# EAGLE board sensor LF (EAGLE 7.1.0)
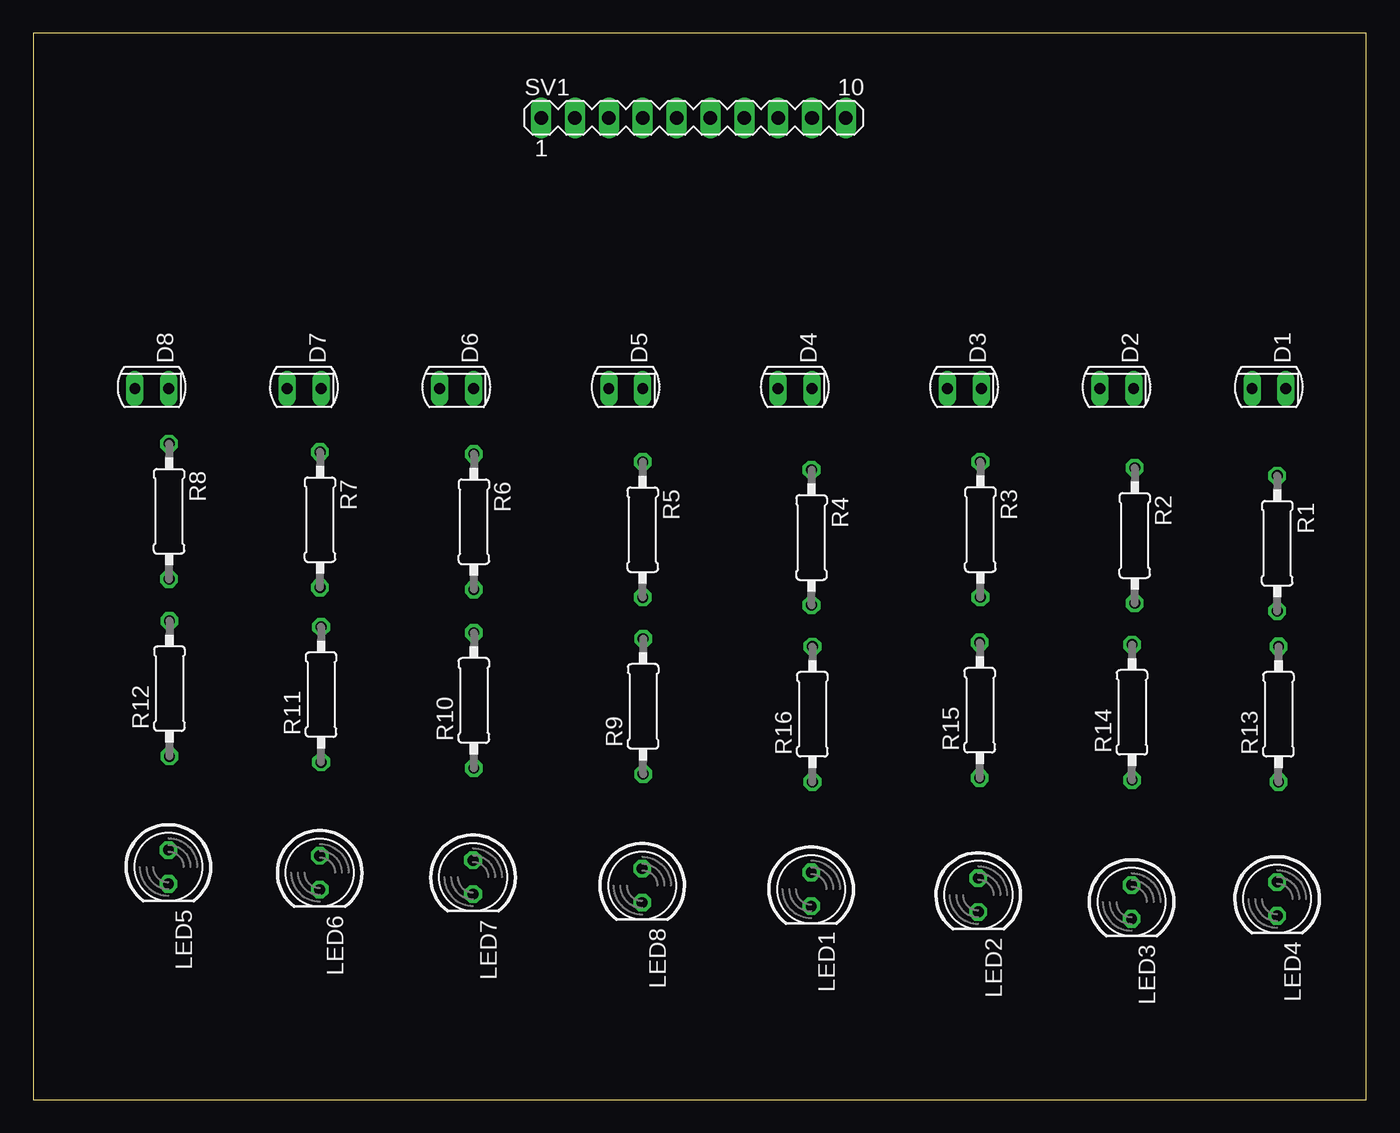
[diagram p0: board, top side]
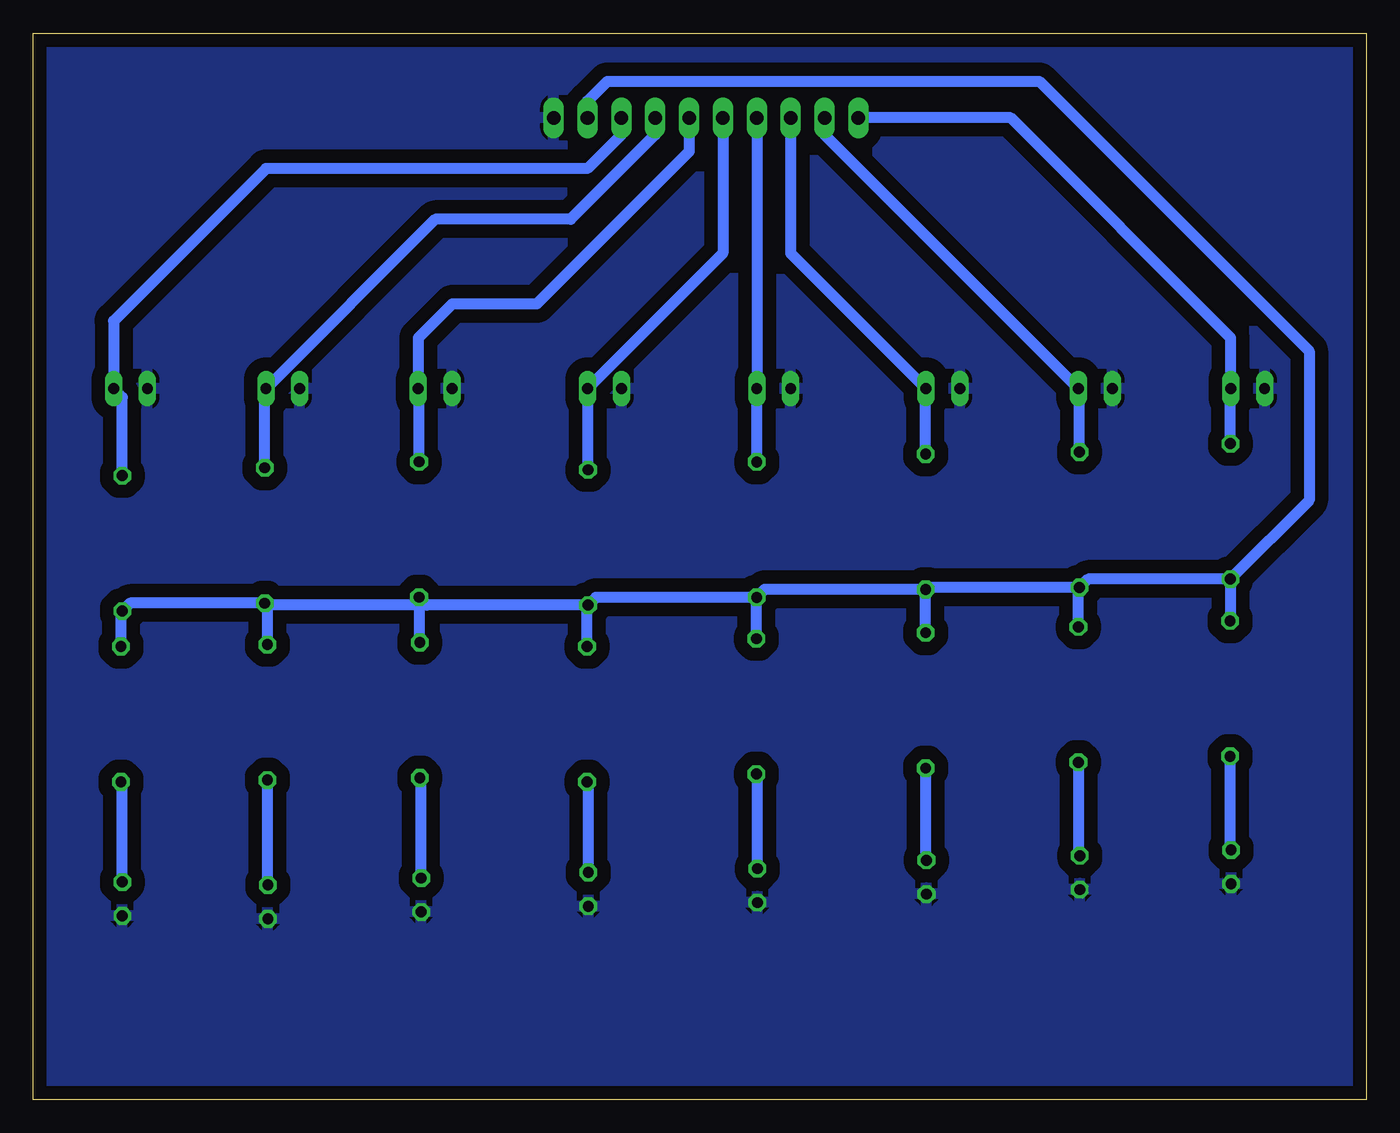
[diagram p1: board, bottom side, seen from below]

Size 100 x 80 mm. Coordinates in mm from the lower left corner, seen from the top.
Outline: 0,0 100,0 100,80 0,80 0,0
Copper layers (1*16): Top 0.035mm / dielectric 1.5mm / Bottom 0.035mm
Design rules "default": minimum track width 10mil, minimum drill 24mil, track to track 8mil, track to pad 8mil, pad to pad 8mil, via to via 8mil, smd to smd 8mil, copper to edge 40mil, drill to drill 8mil, minimum pad ring 10mil, minimum via ring 8mil, stop-mask expansion 4mil, vias tented up to drill 0mil, thermal gap 10mil

## Footprints (pad centres in the part's own frame; a part is rotated, then mirrored left to right if it is on the bottom)
SFH225 = drill 0.813 long: A 0,1.27; K 0,-1.27
LED5MM = drill 0.813 octagon: A -1.27,0; K 1.27,0
0207/10 = drill 0.813 octagon: 1 -5.08,0; 2 5.08,0
MA10-1 = drill 1.016 long: 1 -11.43,0; 2 -8.89,0; 3 -6.35,0; 4 -3.81,0; 5 -1.27,0; 6 1.27,0; 7 3.81,0; 8 6.35,0; 9 8.89,0; 10 11.43,0

## Placement (x,y rotation side)
D1  PhotoDioda  [SFH225]  92.71,53.34 90 top
D2  PhotoDioda  [SFH225]  81.28,53.34 90 top
D3  PhotoDioda  [SFH225]  69.85,53.34 90 top
D4  PhotoDioda  [SFH225]  57.15,53.34 90 top
D5  PhotoDioda  [SFH225]  44.45,53.34 90 top
D6  PhotoDioda  [SFH225]  31.75,53.34 90 top
D7  PhotoDioda  [SFH225]  20.32,53.34 90 top
D8  PhotoDioda  [SFH225]  8.89,53.34 90 top
LED1  LED putih SB  [LED5MM]  58.36,15.78 270 top
LED2  LED putih SB  [LED5MM]  70.9,15.35 270 top
LED3  LED putih SB  [LED5MM]  82.4,14.83 270 top
LED4  LED putih SB  [LED5MM]  93.32,15.05 270 top
LED5  LED putih SB  [LED5MM]  10.13,17.45 270 top
LED6  LED putih SB  [LED5MM]  21.49,17.02 270 top
LED7  LED putih SB  [LED5MM]  32.99,16.69 270 top
LED8  LED putih SB  [LED5MM]  45.68,16.05 270 top
R1  [0207/10]  93.32,41.73 270 top
R2  [0207/10]  82.63,42.32 270 top
R3  [0207/10]  71.05,42.77 270 top
R4  [0207/10]  58.38,42.17 270 top
R5  [0207/10]  45.72,42.76 270 top
R6  [0207/10]  33.05,43.35 270 top
R7  [0207/10]  21.51,43.5 270 top
R8  [0207/10]  10.18,44.13 270 top
R9  330  [0207/10]  45.75,29.5 90 top
R10  330  [0207/10]  33.05,29.94 90 top
R11  330  [0207/10]  21.59,30.38 90 top
R12  330  [0207/10]  10.22,30.83 90 top
R13  330  [0207/10]  93.42,28.91 90 top
R14  330  [0207/10]  82.44,29.05 90 top
R15  330  [0207/10]  71.01,29.21 90 top
R16  330  [0207/10]  58.45,28.91 90 top
SV1  [MA10-1]  49.53,73.66 0 top

## Library data of the parts
D1-D8 = opto-trans-siemens
LED1-LED8 = led
R1-R16 = resistor
SV1 = con-lstb

## Nets
GND: D1.A D2.A D3.A D4.A D5.A D6.A D7.A D8.A LED1.K LED2.K LED3.K LED4.K LED5.K LED6.K LED7.K LED8.K SV1.10
N$1: LED7.A R10.1
N$2: D7.K R7.1 SV1.2
N$3: D8.K R8.1 SV1.1
N$4: D1.K R1.1 SV1.8
N$5: D2.K R2.1 SV1.7
N$6: D3.K R3.1 SV1.6
N$7: D5.K R5.1 SV1.4
N$8: D4.K R4.1 SV1.5
N$9: D6.K R6.1 SV1.3
N$10: LED6.A R11.1
N$11: LED5.A R12.1
N$12: LED4.A R13.1
N$13: LED3.A R14.1
N$14: LED2.A R15.1
N$15: LED1.A R16.1
N$16: LED8.A R9.1
VCC: R1.2 R2.2 R3.2 R4.2 R5.2 R6.2 R7.2 R8.2 R9.2 R10.2 R11.2 R12.2 R13.2 R14.2 R15.2 R16.2 SV1.9

## Tracks (layer width: path | path; a pad name or v marks a point on that pad's centre or on a via)
GND
  pour Bottom (isolate 1.016): 0.44,79.65 0.59,79.65 0.59,0.15 99.55,0.15 99.55,79.8 0.59,79.8
N$1
  Bottom 0.813: R10.1 33.05,18.02 LED7.A
N$2
  Bottom 0.813: SV1.2 40.64,72.39 D7.K 21.51,53.26 R7.1
N$3
  Bottom 0.813: SV1.1 26.67,73.66 10.16,57.15 D8.K 10.18,53.32 R8.1
N$4
  Bottom 0.813: SV1.8 55.88,72.39 58.42,69.85 82.55,69.85 93.98,58.42 D1.K 93.33,52.69 R1.1
N$5
  Bottom 0.813: SV1.7 53.34,72.39 59.69,66.04 69.85,66.04 D2.K 82.63,53.26 R2.1
N$6
  Bottom 0.813: SV1.6 50.8,71.12 62.23,59.69 68.58,59.69 71.12,57.15 D3.K 71.05,53.27 R3.1
N$7
  Bottom 0.813: SV1.4 D5.K R5.1
N$8
  Bottom 0.813: SV1.5 48.26,63.5 D4.K 58.38,53.3 R4.1
N$9
  Bottom 0.813: SV1.3 43.18,63.5 D6.K 33.05,53.31 R6.1
N$10
  Bottom 0.813: R11.1 21.59,18.39 LED6.A
N$11
  Bottom 0.813: R12.1 10.22,18.8 LED5.A
N$12
  Bottom 0.813: LED4.A 93.32,23.73 R13.1
N$13
  Bottom 0.813: LED3.A 82.4,23.94 R14.1
N$14
  Bottom 0.813: LED2.A 70.9,24.02 R15.1
N$15
  Bottom 0.813: LED1.A 58.36,23.73 R16.1
N$16
  Bottom 0.813: LED8.A 45.68,24.35 R9.1
VCC
  Bottom 0.813: R8.2 10.18,35.95 R12.2 | R8.2 20.88,39.05 R7.2 | R7.2 32.9,38.42 R6.2 | R6.2 45.13,38.27 R5.2 | R5.2 57.8,37.68 R4.2 | R4.2 70.46,37.09 | 70.46,37.09 R3.2 | 70.46,37.09 71.23,37.09 | 71.23,37.09 82.49,37.09 R2.2 | R2.2 92.73,37.24 R1.2 93.42,36.55 R13.2 | R14.2 82.44,37.04 R2.2 | R15.2 71.01,36.87 71.23,37.09 | R16.2 58.45,37.03 R4.2 | R9.2 45.75,37.65 R5.2 | R10.2 R6.2 | R11.2 21.59,38.34 R7.2 | SV1.9 58.42,74.91 56.93,76.4 24.52,76.4 4.28,56.16 4.28,44.95 R8.2